# Allegro board pcb_tutorial.brd

Outline 100 x 50 mm; copper layers: TOP, POWERPLANE_1, BOTTOM. Coordinates in mm from the lower left corner of the outline.
Outline path: rectangle 0,0 100,50

## Design rules (mm)
constraint set DEFAULT: min track width 0.127
net group DPD: nets D+ D-

## Placement (name value [footprint] x y rotation side)
C1  10uF  [0402-CAP]  12 36 270 top
C2  100uF  [1210]  7 30 0 top
C3  10uF  [0402-CAP]  35 19 180 top
C4  0.1uF  [0402-CAP]  5 20 0 top
C5  0.1uF  [0402-CAP]  5 17 0 top
C6  0.1uF  [0402-CAP]  10 41 90 top
C7  0.1uF  [0402-CAP]  33 27 90 top
C8  0.1uF  [0402-CAP]  7 41 90 top
C9  10uF  [0402-CAP]  11 26 180 top
IC1  PIC32MX440F512H  [SQFP-S-10X10-64]  21 25 90 top
JP1  -  [XTEND-DIGI-MODEM]  69 25 0 top
JP2  PIC 32 PROG  [1X06_LOCK]  12.06 14.61 0 top
MAIN_PWR  LED  [LED_LNJ]  24 4 90 top
NOREF  -  []  0 0 0 top
NOREF#2  -  [unnamed#2]  4 4 0 top
NOREF#3  -  []  0 50 0 top
NOREF#4  -  []  0 0 90 top
NOREF#5  -  []  0 0 0 top
NOREF#6  -  [unnamed#2]  96 4 0 top
NOREF#7  -  [unnamed#2]  4 46 0 top
NOREF#8  -  []  -24 -101 0 top
NOREF#9  -  [unnamed#2]  96 46 0 top
R1  150  [0402-RES]  20 4 90 top
R2  56k  [0402-RES]  35 22 180 top
U1  LT1965EMS8E-1P5  [MSOP_8_ADI]  6 36 0 top
X1  USB-B  [USB-MICROB]  20 46 180 top
Y1  8MHz  [CRYSTAL-SMD]  22 36 270 top

## Library data of the parts
C1-C9 = CAP NP
IC1 = PIC32MX440F512H
JP1 = XTEND-DIGI-MODEM
JP2 = M06_LOCK
MAIN_PWR = LED
R1 R2 = RESISTOR
U1 = LT1965EMS8E-1P5_1
X1 = USB-MICROB
Y1 = CRYSTAL

## Footprints (pads in the part's own frame, mm; a bottom-side part is the same pattern mirrored in y, then rotated)
1X06_LOCK
  round 1.88 hole 1.016: 1(0,0) 2(2.54,-0.254) 3(5.08,0) 4(7.62,-0.254) 5(10.16,0) 6(12.7,-0.254)
0402-CAP
  rect 0.7x0.9 smd: 1(-0.65,0) 2(0.65,0)
0402-RES
  rect 0.7x0.9 smd: 1(-0.65,0) 2(0.65,0)
1210
  rect 1.2x2 smd: 1(-1.6,0) 2(1.6,0)
CRYSTAL-SMD
  rect 1.1x1.9 smd: 1(-1.15,1.85) 2(-1.15,-1.85) 3(1.15,-1.85) 4(1.15,1.85)
LED_LNJ
  rect 0.445x0.95 smd: 1(-0.652,0) 2(0.652,0)
MSOP_8_ADI
  rect 1.31x0.431 smd: 1(-2.235,0.975) 2(-2.235,0.325) 3(-2.235,-0.325) 4(-2.235,-0.975) 5(2.235,-0.975) 6(2.235,-0.325) 7(2.235,0.325) 8(2.235,0.975)
SQFP-S-10X10-64
  rect 1.6x0.295 smd: 1(-5.6,3.75) 2(-5.6,3.25) 3(-5.6,2.75) 4(-5.6,2.25) 5(-5.6,1.75) 6(-5.6,1.25) 7(-5.6,0.75) 8(-5.6,0.25) 9(-5.6,-0.25) 10(-5.6,-0.75) 11(-5.6,-1.25) 12(-5.6,-1.75) 13(-5.6,-2.25) 14(-5.6,-2.75) 15(-5.6,-3.25) 16(-5.6,-3.75) 33(5.6,-3.75) 34(5.6,-3.25) 35(5.6,-2.75) 36(5.6,-2.25) 37(5.6,-1.75) 38(5.6,-1.25) 39(5.6,-0.75) 40(5.6,-0.25) 41(5.6,0.25) 42(5.6,0.75) 43(5.6,1.25) 44(5.6,1.75) 45(5.6,2.25) 46(5.6,2.75) 47(5.6,3.25) 48(5.6,3.75)
  rect 0.295x1.6 smd: 17(-3.75,-5.6) 18(-3.25,-5.6) 19(-2.75,-5.6) 20(-2.25,-5.6) 21(-1.75,-5.6) 22(-1.25,-5.6) 23(-0.75,-5.6) 24(-0.25,-5.6) 25(0.25,-5.6) 26(0.75,-5.6) 27(1.25,-5.6) 28(1.75,-5.6) 29(2.25,-5.6) 30(2.75,-5.6) 31(3.25,-5.6) 32(3.75,-5.6) 49(3.75,5.6) 50(3.25,5.6) 51(2.75,5.6) 52(2.25,5.6) 53(1.75,5.6) 54(1.25,5.6) 55(0.75,5.6) 56(0.25,5.6) 57(-0.25,5.6) 58(-0.75,5.6) 59(-1.25,5.6) 60(-1.75,5.6) 61(-2.25,5.6) 62(-2.75,5.6) 63(-3.25,5.6) 64(-3.75,5.6)
unnamed#2
  round 4.064 hole 3.81: (0,0)
USB-MICROB
  rect 0.35x1.4 smd: D+(0,2.65) D-(-0.65,2.65) GND(1.3,2.65) ID(0.65,2.65) VBUS(-1.3,2.65)
  rect 1.8x1.9 smd: MT1(-3.8,0) MT2(3.8,0)
  rect 2.1x1.6 smd: MT3(-3.1,2.55) MT4(3.1,2.55)
  rect 1.9x1.9 smd: P_1(-1.2,0) P_2(1.2,0)
XTEND-DIGI-MODEM
  round 0 hole 3.3 unplated: (-26.5,14.5) (-26.5,-14.5) (26.5,14.5) (26.5,-14.5)
  round 1.422 hole 0.7: 1(-27.5,9) 2(-25.5,9) 3(-27.5,7) 4(-25.5,7) 5(-27.5,5) 6(-25.5,5) 7(-27.5,3) 8(-25.5,3) 9(-27.5,1) 10(-25.5,1) 11(-27.5,-1) 12(-25.5,-1) 13(-27.5,-3) 14(-25.5,-3) 15(-27.5,-5) 16(-25.5,-5) 17(-27.5,-7) 18(-25.5,-7) 19(-27.5,-9) 20(-25.5,-9)

## Nets
3.3V: C2.1 C4.1 C5.1 C6.1 C7.1 C8.1 IC1.10 IC1.19 IC1.26 IC1.35 IC1.38 JP2.2 R1.1 R2.2 U1.1 U1.2 U1.3(\SENSE/ADJ*\)
GND: C1.2 C2.2 C3.2 C4.2 C5.2 C6.2 C7.2 C8.2 C9.2 IC1.9 IC1.20 IC1.25 IC1.41 JP1.1 JP2.3 MAIN_PWR.1(\CATHODE\) U1.4 U1.5 X1.GND Y1.2 Y1.4(\GND_4\)
VBUS: C1.1 IC1.34 JP1.2(\VCC\) U1.6 U1.7 U1.8 X1.VBUS(\VBUS\)
CTS: IC1.21 JP1.9
D+: IC1.37 X1.D+
D-: IC1.36 X1.D-
PROG0: IC1.17 JP2.5
PROG1: IC1.18 JP2.4
RESET: IC1.7(\_MCLR\) JP2.1
RTS: IC1.29 JP1.10
SHDN: IC1.59 JP1.7
URX: IC1.31 JP1.6
UTX: IC1.32 JP1.5
N01899: MAIN_PWR.2 R1.2
N02098: IC1.39 Y1.1
N02102: IC1.40 Y1.3
N02114: C9.1 IC1.56
N02189: C3.1 JP1.11 R2.1

Pads without a net: IC1 1 2 3 4 5 6 8 11 12 13 14 15 16 22 23 24 27 28 30 33 42 43 44 45 46 47 48 49 50 51 52 53 54 55 57 58 60 61 62 63 64; JP1 3 4 8 12 13 14 15 16 17 18 19 20; JP2 6; X1 ID MT1 MT2 MT3 MT4 P_1 P_2

## Via types
v1: diameter 0.61, hole 0.33, TOP to BOTTOM, 31 vias

## Routing (per net, layer and track width the routed paths; a pad name or vN(x,y) marks a point on that pad's centre or on a via; arc(x,y) is an arc through that point)
3.3V: length 20.6
  TOP w0.28: IC1.19 v1(28.37,22.25) ; IC1.26 v1(27.83,25.75) ; IC1.10 v1(21.75,17.63)
  TOP w0.381: v1(2.68,36.98) U1.1 U1.2 U1.3 ; C6.1 v1(10,39.57) ; C7.1 v1(33,25.57) ; IC1.38 v1(22.25,31.83) ; R1.1 v1(20,2.57) ; IC1.35 v1(23.75,31.83) ; C2.1 v1(4.37,30) ; C8.1 v1(7,39.57) ; R2.2 v1(33.57,22) ; C4.1 v1(3.57,20) ; C5.1 v1(3.57,17)
  POWERPLANE_1 w0.381: JP2.2 15.72,14.35 ; JP2.2 14.61,13.23 ; JP2.2 13.49,14.35 ; JP2.2 14.61,15.47
GND: length 43.3
  TOP w0.28: v1(20.8,20.91) 21.25,20.45 IC1.9 ; IC1.20 25.29,22.75 25.23,22.81 v1(24.61,22.81) ; IC1.25 v1(24.61,25.25)
  TOP w0.381: MAIN_PWR.1 v1(24,2.69) ; U1.4 v1(2.68,35.02) ; U1.5 v1(9.32,35.02) ; C9.2 v1(9.57,26) ; C8.2 v1(7,42.43) ; C4.2 v1(6.43,20) ; Y1.4 24.25,34.85 25.4,36 25.4,37.55 24.21,38.73 21.73,38.73 21.32,38.32 21.32,37.92 20.55,37.15 Y1.2 19.75,37.15 18.88,36.28 18.88,33.7 v1(20.75,31.83) IC1.41 ; C7.2 v1(33,28.43) ; C6.2 v1(10,42.43) ; C2.2 v1(9.63,30) ; C1.2 v1(12,34.57) ; C3.2 v1(33.57,19) ; X1.GND v1(18.7,42.22) ; C5.2 v1(6.43,17)
  BOTTOM w0.381: JP2.3 17.14,15.72 ; JP2.3 17.14,13.49 ; JP2.3 18.26,14.61 ; JP2.3 16.03,14.61 ; 41.5,33.11 JP1.1 ; JP1.1 42.39,34 ; JP1.1 41.5,34.89 ; JP1.1 40.61,34
VBUS: length 58.8
  TOP w0.127: 28.41,34.88 41.1,34.88 41.13,34.9 42.6,34.9 JP1.2 ; 28.41,34.88 28.41,36.71 24.49,40.64 23.48,40.64 21.3,42.83 X1.VBUS ; 28.41,34.88 28.41,33.05 24.53,29.16 23.8,29.16 ; IC1.34 24.25,29.61 23.8,29.16 ; U1.6 U1.7 ; U1.7 U1.8 ; U1.7 11.03,36.33 11.36,36.65 C1.1 12.67,36.65 14.45,34.88 14.45,32.19 17.47,29.16 23.8,29.16
CTS: length 16
  TOP w0.127: IC1.21 37.11,23.25 39.86,26 JP1.9
D+: length 18.7
  TOP w0.127: IC1.37 22.75,31.89 24.77,33.91 25.29,33.91 26.42,35.03 26.42,37.99 24.66,39.75 22.12,39.75 20,41.87 X1.D+
D-: length 18.5
  TOP w0.127: X1.D- 20.65,41.58 22.23,40.01 24.77,40.01 26.67,38.1 26.67,34.9 25.5,33.73 25.47,33.73 25.4,33.66 24.87,33.66 23.25,32.03 IC1.36
PROG0: length 8.5
  TOP w0.127: IC1.17 26.6,18.98 JP2.5
PROG1: length 11.6
  TOP w0.127: IC1.18 25.61,21.75 25.4,21.54 25.4,18.83 23.08,16.51 21.84,16.51 JP2.4
RESET: length 10.8
  TOP w0.127: JP2.1 14.61,17.14 18.99,17.14 20.25,18.41 IC1.7
RTS: length 17.4
  TOP w0.127: IC1.29 29.69,27.25 30.04,26.9 42.6,26.9 JP1.10
SHDN: length 36.5
  TOP w0.127: JP1.7 42.6,29.1 43.87,29.1 44.4,29.63 44.4,30.37 43.87,30.9 26.98,30.9 19.83,23.75 IC1.59
URX: length 17.6
  TOP w0.127: IC1.31 30.68,28.25 31.53,29.1 42.24,29.1 43.14,30 JP1.6
UTX: length 15.4
  TOP w0.127: IC1.32 30.55,28.75 31.8,30 JP1.5
N01899: length 4
  TOP w0.127: MAIN_PWR.2 20.64,4.65 20.64,4.65 R1.2
N02098: length 7.8
  TOP w0.127: Y1.1 23.85,36.02 23.42,35.59 22.82,35.59 21.75,34.52 IC1.39
N02102: length 7.4
  TOP w0.127: IC1.40 21.25,32.52 20.75,33.02 20.28,33.02 20.15,33.15 20.15,33.35 20.28,33.47 21.37,33.47 21.5,33.6 21.5,33.86 21.37,33.98 20.28,33.98 20.15,34.11 Y1.3
N02114: length 4.1
  TOP w0.127: IC1.56 14.41,25.25 13.66,26 C9.1
N02189: length 9.7
  TOP w0.127: JP1.11 39.5,22 R2.1 C3.1

## Copper pours and planes (outline as drawn; the poured copper is in the pictures)
3.3V on POWERPLANE_1: 0.3,49.7 99.7,49.7 99.7,0.3 0.3,0.3
GND on BOTTOM: 0.3,49.7 99.7,49.7 99.7,0.3 0.3,0.3

## Text on the board
User.Comments: A | EMA Design Automation | 225 Tech Park Drive | Rochester, NY, 14623 | EMA-123 | 1 of 1
XSECTION_CHART: *  SURFACE | L1 TOP CONDUCTOR | *  DIELECTRIC | L2 POWERPLANE_1 PLANE | L3 BOTTOM CONDUCTOR | DESIGN CROSS SECTION CHART | ___________________________ | TOTAL THICKNESS 0.49784 MM | 1-3
DIMENSION: FIGURE | FINISHED_SIZE | 0.3302 | 0.7 | 1.016 | 3.81 | 3.3 | DRILL CHART: TOP to BOTTOM | ALL UNITS ARE IN MILLIMETERS | PLATED | NON-PLATED | QTY | 31 | 20 | 6 | 4
